# Altium PCB ATRACK_KEY_V2.PcbDoc
Units mil, origin at the board's own origin, x right, y up, seen from the top; angles counter-clockwise.
Board outline 1086.63 x 551.18 mil, 2 copper layers (Top Layer, Bottom Layer); 17 components, 15 nets, 56 pads, 0 vias.
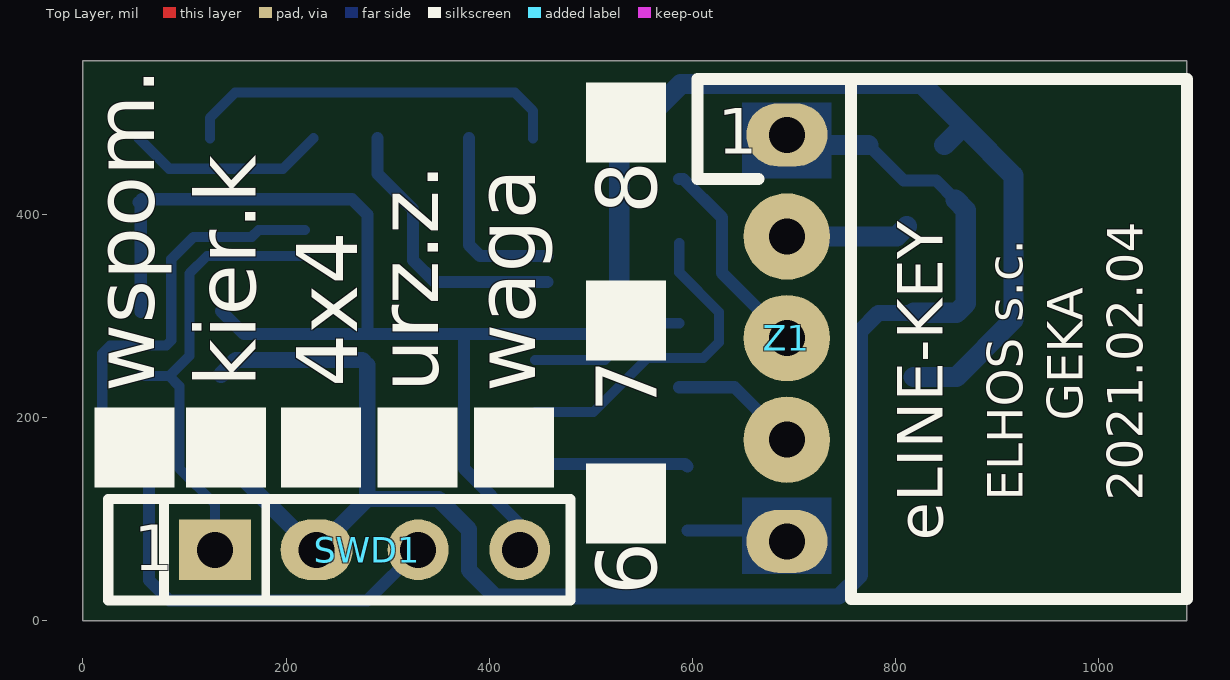
[diagram p0: Top Layer view]
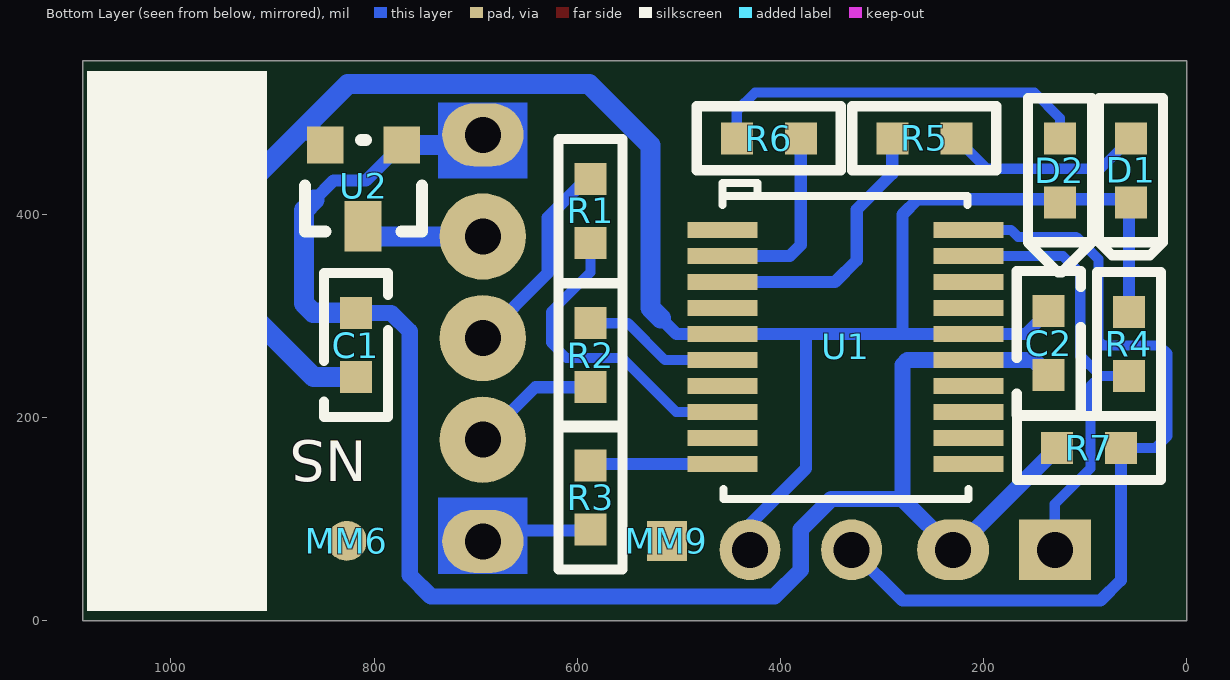
[diagram p1: Bottom Layer view, seen from below]

## Layer stack, top to bottom
Top Layer: signal copper 1.4
Dielectric: dielectric 12.6, FR-4, Dk 4.8
Bottom Layer: signal copper 1.4

## Board outline
1086.63,551.18 0,551.18 0,0 1086.63,0

## Design rules (kind name [scope] priority, off if disabled: settings)
Clearance [All] p1: gap=8
ComponentClearance [All] p1 off: gap=10 collisioncheckmode=3 verticalgap=10 showdistances=FALSE
HoleSize [All] p1: absolutevalues=TRUE maxlimit=200 minlimit=11.81 maxpercent=80.000 minpercent=20.000
MinimumSolderMaskSliver [All] p1: minsoldermaskwidth=4
PolygonConnect [All] p1: connectstyle=Relief reliefconductorwidth=10 reliefentries=4 polygonreliefangle="90 Angle"
RoutingVias [All] p1: holewidth=19.68 width=40 viastyle="Through Hole" minholewidth=11.81 minwidth=25 maxholewidth=196.85 maxwidth=200
SilkToSilkClearance [All] p1: silktosilkclearance=4
SilkscreenOverComponentPads [All] p1: minsilkscreentomaskgap=4
SolderMaskExpansion [All] p1: expansion=4
Width [All] p1: maxlimit=100 minlimit=10 preferedwidth=10 minimp=50.000000 maximp=50.000000 favimp=50.000000
23 further rules are at their usual default settings.

## Components (designator, comment, footprint, x,y, rotation, side; value= is the part's Value field where it differs from the comment)
C1 "100n" 0603C 817.93,236.06 r270 bottom
C2 "100n" 0603C 136,308.93 r90 bottom
D1 "" 0603LG 55,478.94 r90 bottom
D2 "" 0603LR 125,478.94 r90 bottom
MM6 "" REF_CIR 826.77,78.74 r180 bottom
MM9 "" REF_SQR 511.81,78.74 r180 bottom
R1 "33R" 0603R 587,368.06 r270 bottom
R2 "33R" 0603R 587,296.94 r90 bottom
R3 "33R" 0603R 587,157 r90 bottom
R4 "10k" 0603R 57,307.94 r90 bottom
R5 "1k" 0603R 223.07,475 r180 bottom
R6 "1k" 0603R 446.93,475 r0 bottom
R7 "10k" 0603R 131.93,170 r0 bottom
SWD1 "ST-LINK" PIN4 130,70 r0 top
U1 "STM32L011F4P6" TSSOP20 457,384.72 r270 bottom
U2 "MCP1700T-3302E/TT" SOT-23 772.93,468.36 r180 bottom
Z1 "ZL263-5SG" PIN5_ZL 692.93,478.36 r270 top locked

## Footprints (in the part's own frame and the unit in brackets; to place one, negate y for a bottom-side part, rotate by r counter-clockwise, add the part's x,y. Pads: shape width x height; smd on the part's side, far side on the other; paste and mask are expansions set on the pad)
0603C [mm]
  rect 0.8x0.8 smd: 1(-0.1,0) 2(-1.7,0)
  silkscreen extent -2.7,-0.8 0.9,0.8
0603LG [mm]
  rect 0.8x0.8 smd: A(-1.7,0) K(-0.1,0)
  silkscreen extent -3.03,-0.8 0.9,0.8
0603LR [mm]
  rect 0.8x0.8 smd: A(-1.7,0) K(-0.1,0)
  silkscreen extent -3.45,-0.8 0.9,0.8
0603R [mm]
  rect 0.8x0.8 smd: 1(-0.1,0) 2(-1.7,0)
  silkscreen extent -2.7,-0.8 0.9,0.8
PIN4 [mil]
  rect 70.87x60 hole 35.43: 1(0,0)
  oval 70.87x60 hole 35.43: 2(100,0)
  round 60 hole 35.43: 3(200,0) 4(300,0)
  silkscreen extent -50,-50 350,50
PIN5_ZL [mil]
  oval 62x80 hole 35.43: 1(0,0) 5(400,0)
  round 85 hole 35.43: 2(100,0) 3(200,0) 4(300,0)
  silkscreen extent -55,63 457,394
REF_CIR [mm]
  round 1 smd paste-0.5 mask+0.5: 0(0,0)
REF_SQR [mm]
  rect 1x1 smd paste-0.5 mask+0.5: ""(0,0)
SOT-23 [mil]
  rect 36x36 smd: 1(0,0) 2(-75,0)
  rect 36x50 smd: 3(-38,-80)
  silkscreen extent -95,-85 20,5
TSSOP20 [mm]
  rect 0.4x1.75 smd mask+0.152: 1(0,0) 2(0.65,0) 3(1.3,0) 4(1.95,0) 5(2.6,0) 6(3.25,0) 7(3.9,0) 8(4.55,0) 9(5.2,0) 10(5.85,0) 11(5.85,6.15) 12(5.2,6.15) 13(4.55,6.15) 14(3.9,6.15) 15(3.25,6.15) 16(2.6,6.15) 17(1.95,6.15) 18(1.3,6.15) 19(0.65,6.15) 20(0,6.15)
  silkscreen extent -1.17,0 6.73,6.15

## Part data
C1 C2: library part CAP
D1 D2: library part LED
MM6 MM9: library part MECH
R1 R2 R3 R4 R5 R6 R7: library part RES3
SWD1: library part SW_CON, "Header, 4-Pin"
Z1: library part CON5, "Connector"

## Nets (pads, with @x,y where several pads share a name; then routed paths per layer and width w, separated by ;. In a path a pad name is that pad's centre, name@x,y a point inside that pad or via, vN(x,y) a via of type N, cw(c..) or ccw(c..) an arc to the next point about the centre after c; other vN are vias at no path point)
GND: C1.2 C2.2 R7.1 SWD1.2 U1.15 U2.1 Z1.1 | length 1687.6
  Bottom Layer w12: U2.1 807.93,433.36 839.93,433.36 858.93,414.36
  Bottom Layer w16: R7.1 227.99,70 SWD1.2 280,120 ; C2.2 150.77,256.77 218.62,256.77 275,256.77 280,251.77 280,120 ; C1.2 782.99,302.99 765,285 765,45 744,24 406,24 380,50 380,90 350,120 280,120
  Bottom Layer w20: Z1.1@709.93,468.36 U2.1 ; C1.2@817.93,303.36 859.93,303.36 868.93,312.36 868.93,404.36 858.93,414.36
IRQ: R3.1 U1.10 | length 151
  Bottom Layer w12: U1.10@445,154.41 U1.10 592.58,154.41 R3.1@595,151.99
LED1: R5.2 U1.3 | length 275.4
  Bottom Layer w12: R5.2 290,440 325,405 325,355 346.46,333.54 U1.3
LED2: R6.2 U1.2 | length 186.5
  Bottom Layer w12: R6.2 380,370 390.87,359.13 U1.2
NetD1_K: D1.K R5.1 | length 196.9
  Bottom Layer w10: D1.K 85,445 197.01,445 R5.1
NetD2_K: D2.K R6.1 | length 382.8
  Bottom Layer w10: D2.K 125,495 150,520 425,520 442.99,502.01 R6.1
NetR1_2: R1.2 Z1.3 | length 232.9
  Bottom Layer w12: R1.2 591.01,434.99 629,397 629,342.29 Z1.3 Z1.3@662.93,278.36
NetR2_2: R2.2 Z1.4 | length 127.3
  Bottom Layer w12: R2.2 641.28,230.01 Z1.4
NetR3_2: R3.2 Z1.5 | length 102.3
  Bottom Layer w12: R3.2@595,89 682.29,89 Z1.5
RX: R2.1 U1.6 | length 157
  Bottom Layer w10: U1.6@445,256.77 U1.6 513.77,256.77 550,293 R2.1
SWCLK: R7.2 SWD1.3 U1.20 | length 852.9
  Bottom Layer w10: R7.2 31,170 19,182 19,263 27,271 82,271 87,276 87,356 109,378 166.28,378 173,384.72 U1.20@218.62,384.72
  Bottom Layer w12: R7.2 65,40 85,20 280,20 SWD1.3
SWDIO: R4.2 SWD1.1 U1.19 | length 447.6
  Bottom Layer w10: R4.2 85.01,241.01 ; SWD1.1 130,115 95,150 95,231.02 85.01,241.01 ; U1.19@218.62,359.13 122.13,359.13 105,342 105,261 85.01,241.01
TX: R1.1 U1.8 | length 323.5
  Bottom Layer w10: U1.8@445,205.59 U1.8 502.59,205.59 555.76,258.76 610.76,258.76 626,274 626,304 587,343 R1.1
VC3: C1.1 C2.1 D1.A D2.A R4.1 SWD1.4 U1.5 U1.16 U2.2 | length 2007.9
  Bottom Layer w12: R4.1 57,410.01 D1.A 57.99,415 265,415 280,400 280,282.36 ; C2.1 158.63,282.36 218.62,282.36 280,282.36 ; SWD1.4 430,95 375,150 375,282.36 ; 518,298 502.36,282.36 445,282.36 375,282.36 ; 280,282.36 375,282.36
  Bottom Layer w20: 518,298 528,308 528,468 588.36,528.36 825.93,528.36 869.29,485 ; C1.1 859.57,240 915.93,296.36 915.93,438.36 869.29,485 ; U2.2 864.57,485 869.29,485
VC5: U2.3 Z1.2 | length 122.1
  Bottom Layer w20: Z1.2 800.93,378.36 U2.3
pads on no net: MM6.0 MM9. U1.1 U1.4 U1.7 U1.9 U1.11 U1.12 U1.13 U1.14 U1.17 U1.18

## Other copper
Bottom Layer:
  rectangle net GND: 648.93,435.36 736.93,510.36
  region net NetR3_2: 736.93,121.36 648.93,121.36 648.93,46.36 736.93,46.36

## Silkscreen, mask and mechanical layers (free items; w line width, h text height)
Top Overlay:
  rectangle: 495,451.26 573.74,530
  rectangle: 495,256.26 573.74,335
  rectangle: 495,76.26 573.74,155
  rectangle: 290,131.26 368.74,210
  region: 90,131.26 90,210 11.26,210 11.26,131.26
  rectangle: 385,131.26 463.74,210
  rectangle: 101.26,131.26 180,210
  rectangle: 195,131.27 273.76,210
  lines w10: 80,20 25,20 25,120 35,120 100,120
  lines w12: 665,435 605,435 605,533.48 755.92,533.48
  text "1" at 625,460 h45
  text "8" at 565,400 h60 r90
  text "kier.k" at 170,230 h60 r90
  text "4x4" at 270,230 h60 r90
  text "wspom." at 70,225 h60 r90
  text "urz.z." at 350,225 h60 r90
  text "waga" at 445,225 h60 r90
  text "7" at 565,205 h60 r90
  text "GEKA" at 984.25,196.85 h35 r90
  text "ELHOS s.c." at 925.2,118.11 h35 r90
  text "2021.02.04" at 1043.31,118.11 h35 r90
  text "eLINE-KEY" at 846.46,78.74 h45 r90
  text "1" at 50,50 h45
  text "6" at 565,25 h60 r90
Bottom Overlay:
  rectangle: 905.51,9.84 1082.67,541.34
  text "NS" at 807.09,177.17 h40 r180
Mechanical 1:
  the board outline again, w12